# EAGLE board PFCEDU_V1 (EAGLE 8.7.1), part 1 of 2
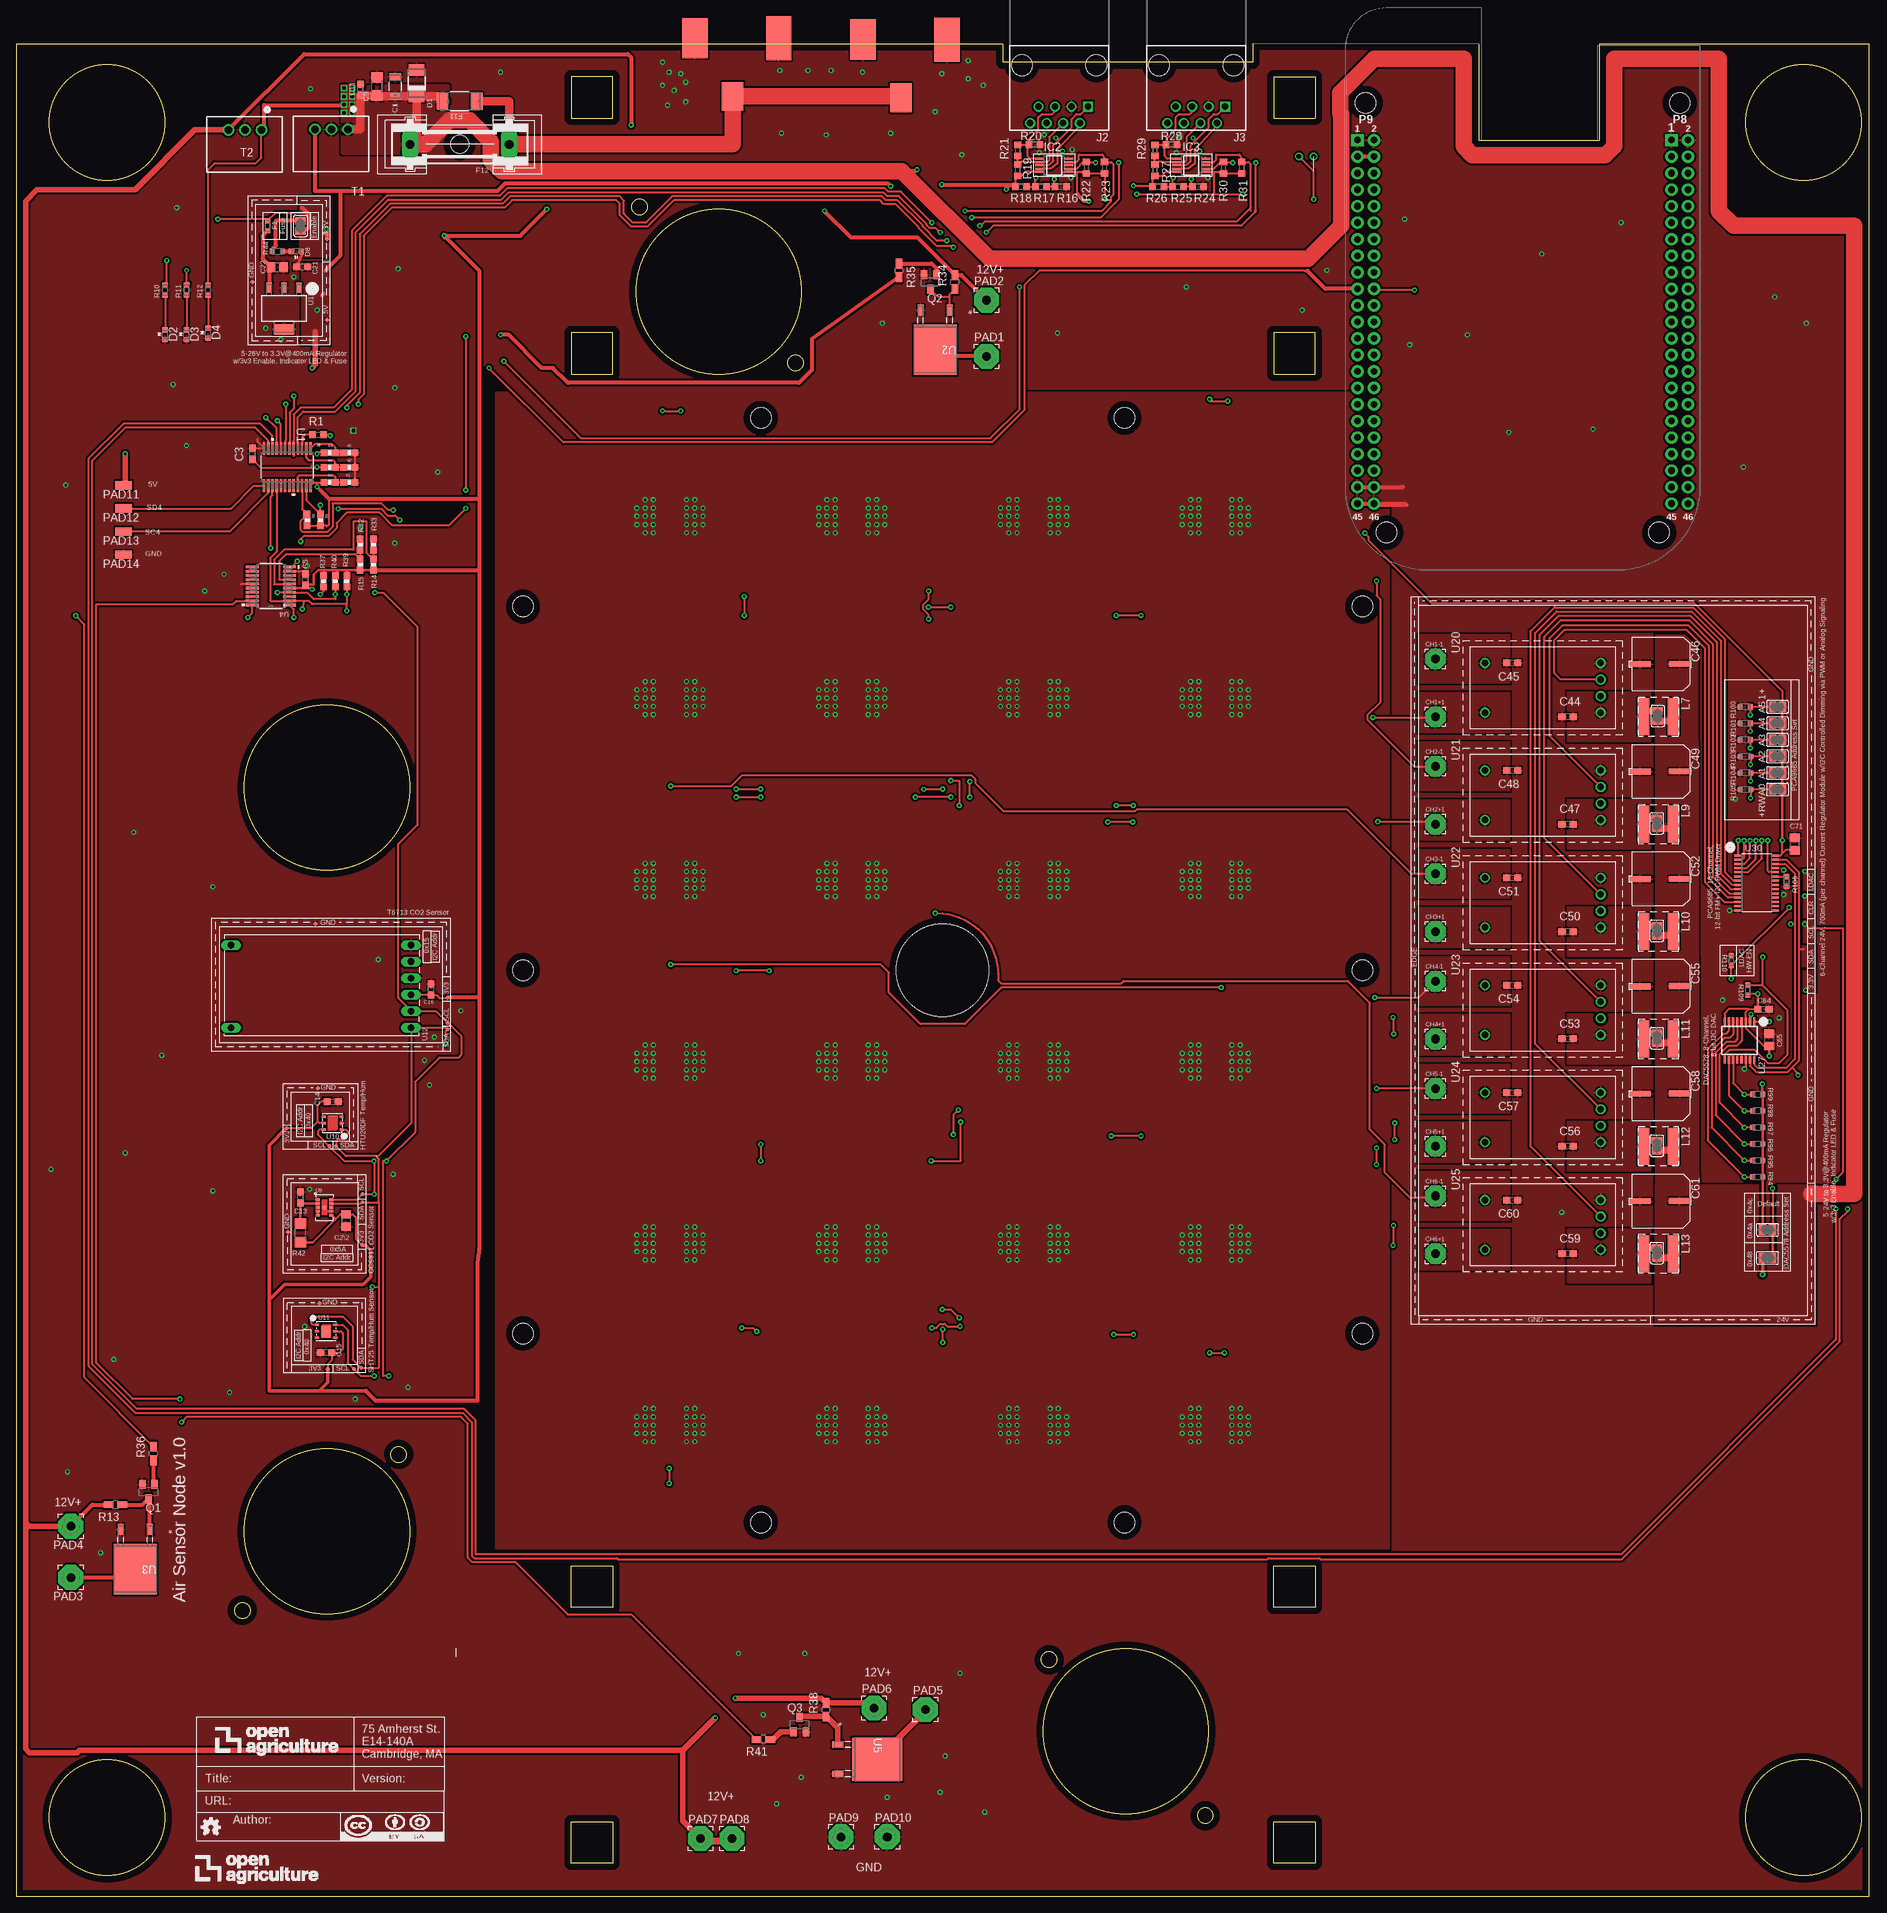
[diagram p0: board, top side]
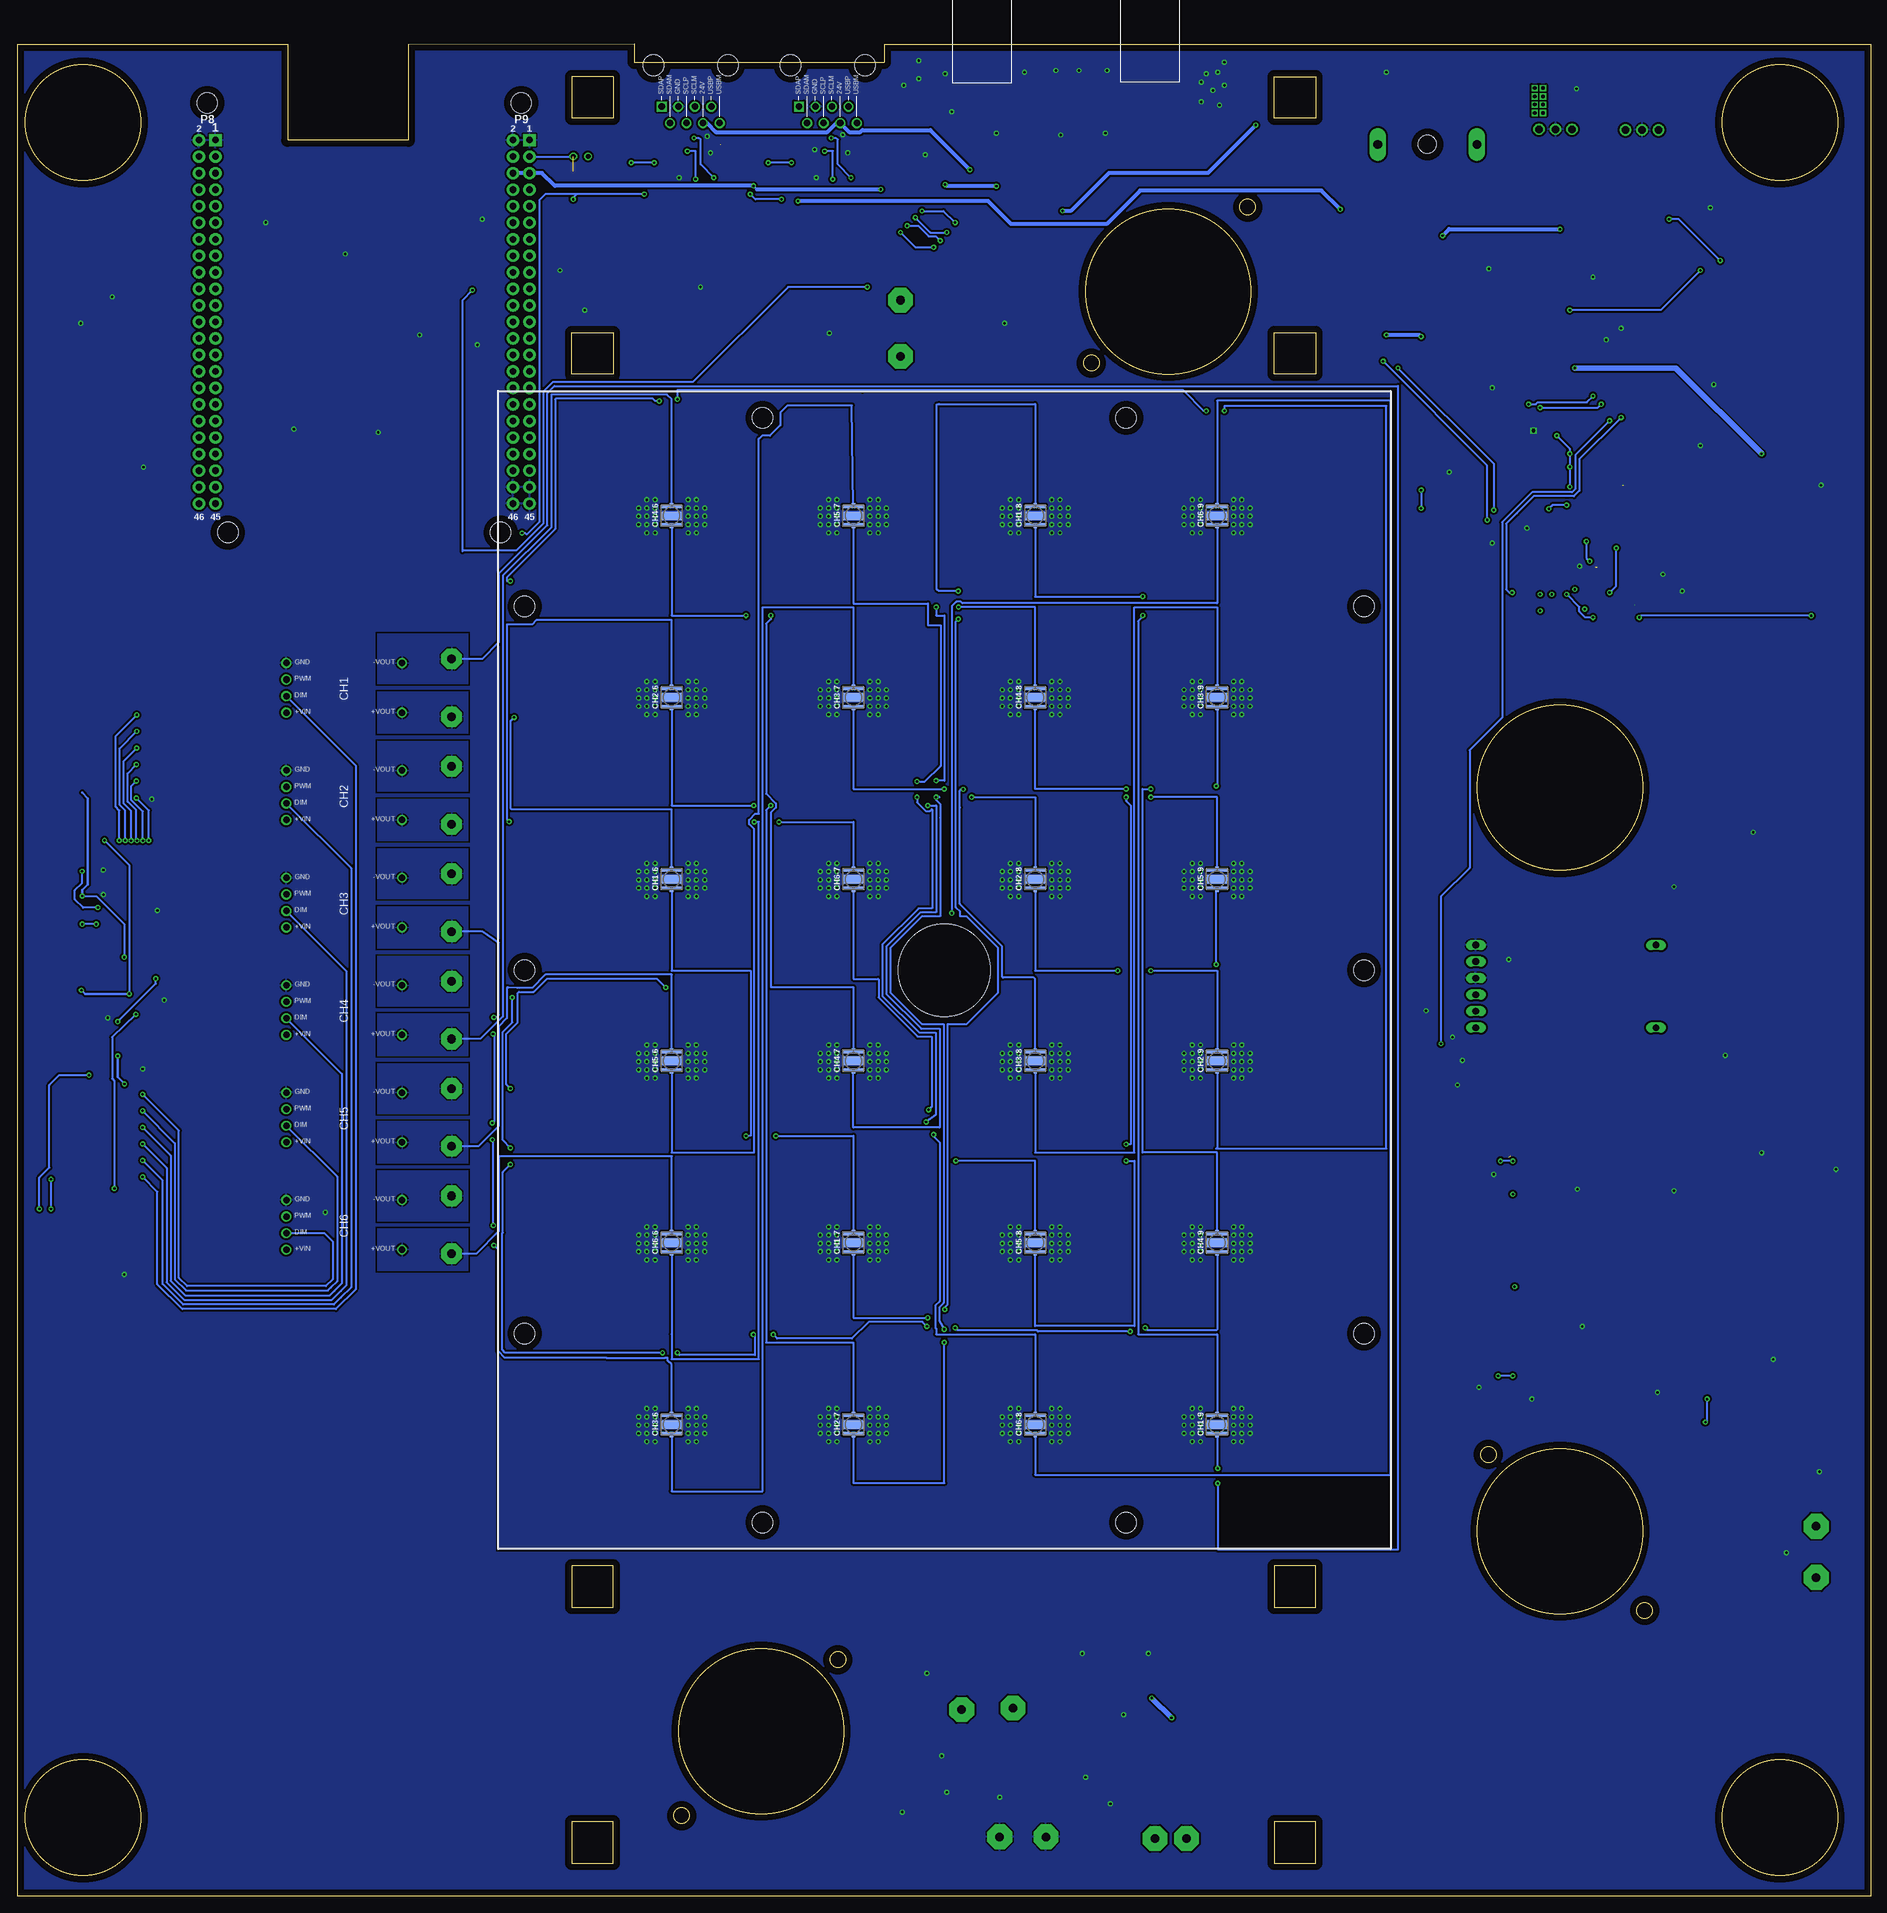
[diagram p1: board, bottom side, seen from below]

Size 284.73 x 284.79 mm. Coordinates in mm from the lower left corner, seen from the top.
Outline: 189.99,281.94 151.62,281.94 151.62,284.73 0,284.73 0,0 284.73,0 284.73,284.73 243.27,284.73 243.27,269.95 224.73,269.95 224.73,284.73 189.99,284.79 189.99,281.94
Outline: 91.66,279.71 85.31,279.71 85.31,273.36 91.66,273.36 91.66,279.71
Outline: 91.66,240.34 85.31,240.34 85.31,233.99 91.66,233.99 91.66,240.34
Outline: 199.61,240.34 193.26,240.34 193.26,233.99 199.61,233.99 199.61,240.34
Outline: 193.26,273.36 199.61,273.36 199.61,279.71 193.26,279.71 193.26,273.36
Outline: 199.61,11.43 199.61,5.08 193.26,5.08 193.26,11.43 199.61,11.43
Outline: 199.61,50.8 199.61,44.45 193.26,44.45 193.26,50.8 199.61,50.8
Outline: 91.66,11.43 91.66,5.08 85.31,5.08 85.31,11.43 91.66,11.43
Outline: 91.66,50.8 91.66,44.45 85.31,44.45 85.31,50.8 91.66,50.8
Outline: circle at 274.7,12.1 radius 8.89
Outline: circle at 13.97,12.1 radius 8.89
Outline: circle at 119.75,235.7 radius 1.2
Outline: circle at 95.76,259.68 radius 1.2
Outline: circle at 158.73,36.4 radius 1.2
Outline: circle at 182.72,12.41 radius 1.2
Outline: circle at 58.75,67.93 radius 1.2
Outline: circle at 34.76,43.94 radius 1.2
Outline: circle at 47.75,170.43 radius 12.7
Outline: circle at 47.75,56.13 radius 12.7
Outline: circle at 274.7,272.69 radius 8.89
Outline: circle at 170.53,25.4 radius 12.7
Outline: circle at 107.95,246.69 radius 12.7
Outline: circle at 13.97,272.69 radius 8.89
Copper layers (1*16): Top 0.035mm / dielectric 1.5mm / Bottom 0.035mm
Design rules "default *": minimum track width 6mil, minimum drill 0.35mm, track to track 4mil, track to pad 4mil, pad to pad 6mil, via to via 6mil, smd to smd 6mil, copper to edge 40mil, drill to drill 6mil, minimum pad ring 10mil, minimum via ring 8mil, stop-mask expansion 4mil, vias tented up to drill 25mil, thermal gap 10mil
Holes 3.17 mm at 114.43,57.48 170.31,57.48 206.86,86.51 206.86,142.39 206.86,198.27 170.31,227.28 114.43,227.28 77.88,198.27 77.88,142.39 77.88,86.51
Holes 14.22 mm at 142.37,142.37
Milling: 2 lines

## Footprints (pad centres in the part's own frame; a part is rotated, then mirrored left to right if it is on the bottom)
CAP_C1206 = smd 1.118 x 1.803: 1 -1.499,0; 2 1.499,0
C0805 = smd 1.3 x 1.5: 1 -0.95,0; 2 0.95,0
C0603@1 = smd 1.1 x 1: 1 -0.85,0; 2 0.85,0
C1206 = smd 1.6 x 1.8: 1 -1.4,0; 2 1.4,0
C0603 = smd 1.1 x 1: 1 -0.85,0; 2 0.85,0
EEE-1HA101UP = smd 0.889 x 3.404: + 0,-3.251 | smd 0.889 x 3.251: - -0.051,2.794
3,17/1,3 = drill 1.321 pad 3.175 octagon: 1 0,0
CREE-XLAMP-XP-E = smd 0.5 x 3.3: A 1.4,0; C -1.4,0 | smd 0.45 x 0.5: A@1 1.725,0; C@1 -1.725,0 | smd 1.3 x 3.3: THERM 0,0
DO-214AC = smd 1.8 x 2.4: A 2.025,0; C -2.025,0
CHIPLED_0603 = smd 0.8 x 0.8: A 0,-0.75; C 0,0.75
0603 = smd 0.756 x 0.8: 1 -0.778,0; 2 0.778,0
SS = smd 1.803 x 2.642: 1 -2.629,0; 2 2.629,0
GSH15 = drill 1.321 pad 2.54 long: 1 -7.62,0; 2 7.62,0 | hole 2.794: 0,0
SOP50P490X110-10N = smd 1.4 x 0.3: 1 -2.2,1; 2 -2.2,0.5; 3 -2.2,0; 4 -2.2,-0.5; 5 -2.2,-1; 6 2.2,-1; 7 2.2,-0.5; 8 2.2,0; 9 2.2,0.5; 10 2.2,1
OPENAG-V1-RJ45 = drill 1: 24V(6) 1.905,8.89; DSCLM(5) 0.635,6.35; DSCLP(4) -0.635,8.89; DSDAM(2) -3.175,8.89; GND(3) -1.905,6.35; USBM(8) 4.445,8.89; USBP(7) 3.175,6.35 | drill 1 square: DSDAP(1) -4.445,6.35 | hole 3.2: -5.715,0; 5.715,0
74404064121 = smd 1.8 x 5.7: 1 -2.3,0; 2 2.3,0
3,81/1,3 = drill 1.321 pad 3.81 octagon: 1 0,0
SMD1,27-2,54 = smd 1.27 x 2.54: 1 0,0
SOT23-BEC = smd 1 x 1.4: B -0.95,-1.1; C 0,1.1; E 0.95,-1.1
R0603 = smd 1 x 1.1: 1 -0.85,0; 2 0.85,0
0603-RES = smd 1.1 x 1: 1 -0.85,0; 2 0.85,0
RC0603N = smd 0.756 x 0.8: 1 -0.778,0; 2 0.778,0
R0805W = smd 1.5 x 1: 1 -1.052,0; 2 1.052,0
R1206 = smd 1.6 x 1.803: 1 -1.422,0; 2 1.422,0
SOLDERJUMPER_REFLOW_NOPASTE = smd 1.168 x 1.6: 1 -0.762,0; 2 0.762,0
R-78E5.0-1.0 = drill 1.15 pad 1.75: 1 3.21,2; 2 5.75,2; 3 8.29,2
TP06R = smd 0.6 x 0.6: TP 0,0
PW24-M = smd 1.981 x 0.406: 1 -2.87,3.575; 2 -2.87,2.925; 3 -2.87,2.275; 4 -2.87,1.625; 5 -2.87,0.975; 6 -2.87,0.325; 7 -2.87,-0.325; 8 -2.87,-0.975; 9 -2.87,-1.625; 10 -2.87,-2.275; 11 -2.87,-2.925; 12 -2.87,-3.575; 13 2.87,-3.575; 14 2.87,-2.925; 15 2.87,-2.275; 16 2.87,-1.625; 17 2.87,-0.975; 18 2.87,-0.325; 19 2.87,0.325; 20 2.87,0.975; 21 2.87,1.625; 22 2.87,2.275; 23 2.87,2.925; 24 2.87,3.575
DPAK = smd 0.94 x 1.702: 1 -2.25,-6.109; 2 2.25,-6.109 | smd 6.655 x 7.722: 3 0,0
PW20-M = smd 1.981 x 0.406: 1 -2.87,2.925; 2 -2.87,2.275; 3 -2.87,1.625; 4 -2.87,0.975; 5 -2.87,0.325; 6 -2.87,-0.325; 7 -2.87,-0.975; 8 -2.87,-1.625; 9 -2.87,-2.275; 10 -2.87,-2.925; 11 2.87,-2.925; 12 2.87,-2.275; 13 2.87,-1.625; 14 2.87,-0.975; 15 2.87,-0.325; 16 2.87,0.325; 17 2.87,0.975; 18 2.87,1.625; 19 2.87,2.275; 20 2.87,2.925
CCS811 = smd 0.6 x 0.4: 1 -1.05,1.2; 2 -1.05,0.6; 3 -1.05,0; 4 -1.05,-0.6; 5 -1.05,-1.2; 6 1.05,-1.2; 7 1.05,-0.6; 8 1.05,0; 9 1.05,0.6; 10 1.05,1.2; EP 0,0
HTU20D(F) = smd 0.4 x 0.6: 1 -1,-1.35; 2 0,-1.35; 3 1,-1.35; 4 1,1.35; 5 0,1.35; 6 -1,1.35
SHT2X = smd 0.3 x 0.4: 1 -1,-1.4; 2 0,-1.4; 3 1,-1.4; 4 1,1.4; 5 0,1.4; 6 -1,1.4 | smd 1.651 x 1.27: 7 0,0
T6713 = drill 1.016 long: 1 1.27,-1.27; 2 1.27,-3.81; 3 1.27,-6.35; 4 1.27,-8.89; 5 1.27,-11.43; 6 1.27,-13.97; 7 28.96,-13.97; 8 28.96,-1.27
MP04A = smd 1.6 x 0.838: 1 -3.2,2.3; 2 -3.2,0; 3 -3.2,-2.3 | smd 1.6 x 3.099: 4 3.2,0
RCD-24-PINNED = drill 1: 1 0,0; 2 0,-2.54; 3 0,-5.08; 4 0,-7.62; 5 17.78,-7.62; 6 17.78,0
TSSOP16 = smd 0.35 x 1.2: 1 -2.275,-2.925; 2 -1.625,-2.925; 3 -0.975,-2.925; 4 -0.325,-2.925; 5 0.325,-2.925; 6 0.975,-2.925; 7 1.625,-2.925; 8 2.275,-2.925; 9 2.275,2.925; 10 1.625,2.925; 11 0.975,2.925; 12 0.325,2.925; 13 -0.325,2.925; 14 -0.975,2.925; 15 -1.625,2.925; 16 -2.275,2.925
TSSOP28 = smd 0.305 x 0.991: 1 -4.225,-2.918; 2 -3.575,-2.918; 3 -2.925,-2.918; 4 -2.275,-2.918; 5 -1.625,-2.918; 6 -0.975,-2.918; 7 -0.325,-2.918; 8 0.325,-2.918; 9 0.975,-2.918; 10 1.625,-2.918; 11 2.275,-2.918; 12 2.925,-2.918; 13 3.575,-2.918; 14 4.225,-2.918; 15 4.225,2.918; 16 3.575,2.918; 17 2.925,2.918; 18 2.275,2.918; 19 1.625,2.918; 20 0.975,2.918; 21 0.325,2.918; 22 -0.325,2.918; 23 -0.975,2.918; 24 -1.625,2.918; 25 -2.275,2.918; 26 -2.925,2.918; 27 -3.575,2.918; 28 -4.225,2.918
PJ-036AH = smd 4.4 x 3.3: 1 2.2,-0.65 | smd 6.75 x 3.9: 2 -6.75,6.45 | smd 6.2 x 3.9: 3 -6.75,-6.45
BEAGLE_BONE_BLACK_CAPE = drill 1.016 pad 1.88 square: P8.1 20.32,50.165; P9.1 20.32,1.905 | drill 1.016 pad 1.88: P8.2 20.32,52.705; P8.3 22.86,50.165; P8.4 22.86,52.705; P8.5 25.4,50.165; P8.6 25.4,52.705; P8.7 27.94,50.165; P8.8 27.94,52.705; P8.9 30.48,50.165; P8.10 30.48,52.705; P8.11 33.02,50.165; P8.12 33.02,52.705; P8.13 35.56,50.165; P8.14 35.56,52.705; P8.15 38.1,50.165; P8.16 38.1,52.705; P8.17 40.64,50.165; P8.18 40.64,52.705; P8.19 43.18,50.165; P8.20 43.18,52.705; P8.21 45.72,50.165; P8.22 45.72,52.705; P8.23 48.26,50.165; P8.24 48.26,52.705; P8.25 50.8,50.165; P8.26 50.8,52.705; P8.27 53.34,50.165; P8.28 53.34,52.705; P8.29 55.88,50.165; P8.30 55.88,52.705; P8.31 58.42,50.165; P8.32 58.42,52.705; P8.33 60.96,50.165; P8.34 60.96,52.705; P8.35 63.5,50.165; P8.36 63.5,52.705; P8.37 66.04,50.165; P8.38 66.04,52.705; P8.39 68.58,50.165; P8.40 68.58,52.705; P8.41 71.12,50.165; P8.42 71.12,52.705; P8.43 73.66,50.165; P8.44 73.66,52.705; P8.45 76.2,50.165; P8.46 76.2,52.705; P9.2 20.32,4.445; P9.3 22.86,1.905; P9.4 22.86,4.445; P9.5 25.4,1.905; P9.6 25.4,4.445; P9.7 27.94,1.905; P9.8 27.94,4.445; P9.9 30.48,1.905; P9.10 30.48,4.445; P9.11 33.02,1.905; P9.12 33.02,4.445; P9.13 35.56,1.905; P9.14 35.56,4.445; P9.15 38.1,1.905; P9.16 38.1,4.445; P9.17 40.64,1.905; P9.18 40.64,4.445; P9.19 43.18,1.905; P9.20 43.18,4.445; P9.21 45.72,1.905; P9.22 45.72,4.445; P9.23 48.26,1.905; P9.24 48.26,4.445; P9.25 50.8,1.905; P9.26 50.8,4.445; P9.27 53.34,1.905; P9.28 53.34,4.445; P9.29 55.88,1.905; P9.30 55.88,4.445; P9.31 58.42,1.905; P9.32 58.42,4.445; P9.33 60.96,1.905; P9.34 60.96,4.445; P9.35 63.5,1.905; P9.36 63.5,4.445; P9.37 66.04,1.905; P9.38 66.04,4.445; P9.39 68.58,1.905; P9.40 68.58,4.445; P9.41 71.12,1.905; P9.42 71.12,4.445; P9.43 73.66,1.905; P9.44 73.66,4.445; P9.45 76.2,1.905; P9.46 76.2,4.445 | hole 3.175: 14.605,3.175; 80.645,6.35; 80.645,48.26; 14.605,51.435

## Placement (x,y rotation side)
ATTRIBUTES  [DOCFIELD]  27.7,8.53 0 top
C1  4.7uF  [CAP_C1206]  58.23,278.22 90 top
C2\2  4.7uF  [C0805]  50.66,103.88 270 top
C3  .1uF  [C0603@1]  36.31,221.75 90 top
C5  .1uF  [C0603@1]  44.45,202.44 90 top
C9  10uF  [C1206]  55.44,278.22 90 top
C11  .1uF  [C0603@1]  52.9,277.71 90 top
C13  0.1uF  [C0603]  43.68,107.43 90 top
C14  0.1uF  [C0603]  48.63,122.17 0 top
C15  0.1uF  [C0603]  47.61,83.56 180 top
C16  0.1uF  [C0603]  63.74,139.39 90 top
C21  0.1uF  [C0603]  43.94,250.44 180 top
C22  10uF  [C0805]  40.13,250.44 0 top
C44  10nF  [C0603]  238.4,181.33 180 top
C45  10nF  [C0603]  229.9,189.59 0 top
C46  100uF  [EEE-1HA101UP]  252.37,189.46 90 top
C47  10nF  [C0603]  238.4,164.82 180 top
C48  10nF  [C0603]  229.9,173.08 0 top
C49  100uF  [EEE-1HA101UP]  252.37,172.95 90 top
C50  10nF  [C0603]  238.4,148.31 180 top
C51  10nF  [C0603]  229.9,156.57 0 top
C52  100uF  [EEE-1HA101UP]  252.37,156.44 90 top
C53  10nF  [C0603]  238.4,131.8 180 top
C54  10nF  [C0603]  229.9,140.06 0 top
C55  100uF  [EEE-1HA101UP]  252.37,139.93 90 top
C56  10nF  [C0603]  238.4,115.29 180 top
C57  10nF  [C0603]  229.9,123.55 0 top
C58  100uF  [EEE-1HA101UP]  252.37,123.42 90 top
C59  10nF  [C0603]  238.4,98.78 180 top
C60  10nF  [C0603]  229.9,107.04 0 top
C61  100uF  [EEE-1HA101UP]  252.37,106.91 90 top
C64  0.1uF  [C0603]  268.5,136.37 0 top
C65  4.7uF  [C0805]  269.39,131.67 90 top
C71  10uF  [C0805]  273.33,161.77 90 top
CH1+1  [3,17/1,3]  218.08,181.33 0 top
CH1-1  [3,17/1,3]  218.08,190.22 0 top
CH1-6  XP-E  [CREE-XLAMP-XP-E]  184.28,156.36 90 bottom
CH1-7  XP-E  [CREE-XLAMP-XP-E]  156.34,100.48 90 bottom
CH1-8  XP-E  [CREE-XLAMP-XP-E]  128.4,212.24 90 bottom
CH1-9  XP-E  [CREE-XLAMP-XP-E]  100.46,72.54 90 bottom
CH2+1  [3,17/1,3]  218.08,164.82 0 top
CH2-1  [3,17/1,3]  218.08,173.71 0 top
CH2-6  XP-E  [CREE-XLAMP-XP-E]  184.28,184.3 90 bottom
CH2-7  XP-E  [CREE-XLAMP-XP-E]  156.34,72.54 90 bottom
CH2-8  XP-E  [CREE-XLAMP-XP-E]  128.4,156.36 90 bottom
CH2-9  XP-E  [CREE-XLAMP-XP-E]  100.46,128.42 90 bottom
CH3+1  [3,17/1,3]  218.08,148.31 0 top
CH3-1  [3,17/1,3]  218.08,157.2 0 top
CH3-6  XP-E  [CREE-XLAMP-XP-E]  184.28,72.54 90 bottom
CH3-7  XP-E  [CREE-XLAMP-XP-E]  156.34,184.3 90 bottom
CH3-8  XP-E  [CREE-XLAMP-XP-E]  128.4,128.42 90 bottom
CH3-9  XP-E  [CREE-XLAMP-XP-E]  100.46,184.3 90 bottom
CH4+1  [3,17/1,3]  218.08,131.8 0 top
CH4-1  [3,17/1,3]  218.08,140.69 0 top
CH4-6  XP-E  [CREE-XLAMP-XP-E]  184.28,212.24 90 bottom
CH4-7  XP-E  [CREE-XLAMP-XP-E]  156.34,128.42 90 bottom
CH4-8  XP-E  [CREE-XLAMP-XP-E]  128.4,184.3 90 bottom
CH4-9  XP-E  [CREE-XLAMP-XP-E]  100.46,100.48 90 bottom
CH5+1  [3,17/1,3]  218.08,115.29 0 top
CH5-1  [3,17/1,3]  218.08,124.18 0 top
CH5-6  XP-E  [CREE-XLAMP-XP-E]  184.28,128.42 90 bottom
CH5-7  XP-E  [CREE-XLAMP-XP-E]  156.34,212.24 90 bottom
CH5-8  XP-E  [CREE-XLAMP-XP-E]  128.4,100.48 90 bottom
CH5-9  XP-E  [CREE-XLAMP-XP-E]  100.46,156.36 90 bottom
CH6+1  [3,17/1,3]  218.08,98.78 0 top
CH6-1  [3,17/1,3]  218.08,107.67 0 top
CH6-6  XP-E  [CREE-XLAMP-XP-E]  184.28,100.48 90 bottom
CH6-7  XP-E  [CREE-XLAMP-XP-E]  156.34,156.36 90 bottom
CH6-8  XP-E  [CREE-XLAMP-XP-E]  128.4,72.54 90 bottom
CH6-9  XP-E  [CREE-XLAMP-XP-E]  100.46,212.24 90 bottom
D1  SMAJ14A  [DO-214AC]  61.54,278.72 90 top
D2  APT1608CGCK  [CHIPLED_0603]  22.87,240.04 180 top
D3  APT1608CGCK  [CHIPLED_0603]  26.17,240.04 180 top
D4  APT1608CGCK  [CHIPLED_0603]  29.47,240.29 180 top
D8  APT1608CGCK  [CHIPLED_0603]  43.05,252.86 270 top
F1  0448.400MR  [0603]  38.61,256.79 90 top
F11  SST 7  [SS]  68.14,275.93 180 top
F12  [GSH15]  68.14,269.33 180 top
IC2  PCA9615DP  [SOP50P490X110-10N]  159.5,266.11 180 top
IC3  PCA9615DP  [SOP50P490X110-10N]  180.58,266.11 180 top
J2  54602-908LF  [OPENAG-V1-RJ45]  160.26,281.48 180 top
J3  54602-908LF  [OPENAG-V1-RJ45]  181.35,281.48 180 top
L7  120uH  [74404064121]  252.37,181.33 180 top
L9  120uH  [74404064121]  252.37,164.82 180 top
L10  120uH  [74404064121]  252.37,148.31 180 top
L11  120uH  [74404064121]  252.37,131.8 180 top
L12  120uH  [74404064121]  252.37,115.29 180 top
L13  120uH  [74404064121]  252.37,98.78 180 top
PAD1  WIREPAD3,81/1,3  [3,81/1,3]  149.1,236.73 0 top
PAD2  WIREPAD3,81/1,3  [3,81/1,3]  149.1,245.36 0 top
PAD3  WIREPAD3,81/1,3  [3,81/1,3]  8.38,49.02 180 top
PAD4  WIREPAD3,81/1,3  [3,81/1,3]  8.38,56.9 180 top
PAD5  WIREPAD3,81/1,3  [3,81/1,3]  139.7,28.7 0 top
PAD6  WIREPAD3,81/1,3  [3,81/1,3]  131.83,28.96 0 top
PAD7  WIREPAD3,81/1,3  [3,81/1,3]  105.16,8.89 0 top
PAD8  WIREPAD3,81/1,3  [3,81/1,3]  109.98,8.89 0 top
PAD9  WIREPAD3,81/1,3  [3,81/1,3]  126.75,9.14 0 top
PAD10  WIREPAD3,81/1,3  [3,81/1,3]  133.86,9.14 0 top
PAD11  [SMD1,27-2,54]  16.51,216.92 90 top
PAD12  [SMD1,27-2,54]  16.51,213.36 90 top
PAD13  [SMD1,27-2,54]  16.51,209.8 90 top
PAD14  [SMD1,27-2,54]  16.51,206.25 90 top
Q1  MMBT2222A  [SOT23-BEC]  20.32,62.23 180 top
Q2  MMBT2222A  [SOT23-BEC]  140.46,248.16 180 top
Q3  MMBT2222A  [SOT23-BEC]  120.4,26.42 0 top
R1  10K  [R0603]  46.35,224.67 0 top
R2  10K  [0603-RES]  48.18,217.36 180 top
R3  10K  [0603-RES]  51.17,217.36 180 top
R4  10K  [0603-RES]  48.2,221.9 180 top
R5  10K  [0603-RES]  51.17,221.9 180 top
R6  10K  [0603-RES]  48.18,219.64 180 top
R7  10K  [0603-RES]  51.17,219.64 180 top
R8  10K  [0603-RES]  44.71,211.59 270 top
R9  10K  [0603-RES]  46.73,211.59 270 top
R10  100  [RC0603N]  22.87,246.9 90 top
R11  100  [RC0603N]  26.17,246.9 90 top
R12  100  [RC0603N]  29.47,246.9 90 top
R13  [R0805W]  15.24,60.2 180 top
R14  10K  [0603-RES]  54.86,204.72 270 top
R15  10K  [0603-RES]  52.83,204.72 270 top
R16  600  [R0603]  160.52,262.81 0 top
R17  120  [R0603]  157.47,262.81 0 top
R18  600  [R0603]  154.42,262.81 0 top
R19  600  [R0603]  153.91,265.35 270 top
R20  600  [R0603]  156.45,269.28 180 top
R21  120  [R0603]  153.91,268.39 270 top
R22  10K  [R0603]  164.45,265.73 270 top
R23  10K  [R0603]  167.25,265.73 270 top
R24  600  [R0603]  181.6,262.81 0 top
R25  120  [R0603]  178.55,262.81 0 top
R26  600  [R0603]  175.5,262.81 0 top
R27  600  [R0603]  175,265.35 270 top
R28  600  [R0603]  177.54,269.28 180 top
R29  120  [R0603]  175,268.39 270 top
R30  10K  [R0603]  185.54,265.73 270 top
R31  10K  [R0603]  188.33,265.73 270 top
R32  10K  [0603-RES]  52.83,207.77 270 top
R33  10K  [0603-RES]  54.86,207.77 270 top
R34  [R0805W]  144.27,248.16 90 top
R35  [R0805W]  135.64,249.94 270 top
R36  [R0805W]  21.08,68.07 90 top
R37  10K  [0603-RES]  47.24,202.18 90 top
R38  [R0805W]  124.46,28.7 90 top
R39  10K  [0603-RES]  50.8,202.18 90 top
R40  10K  [0603-RES]  49.02,202.18 90 top
R41  [R0805W]  114.81,24.13 180 top
R42  4.7K  [R1206]  43.68,101.97 270 top
R44  100  [RC0603N]  40.13,252.86 180 top
R94  1K  [RC0603N]  267.61,110.59 180 top
R95  1K  [RC0603N]  267.61,113.13 180 top
R96  1K  [RC0603N]  267.61,115.67 180 top
R97  1K  [RC0603N]  267.61,118.21 180 top
R98  1K  [RC0603N]  267.61,120.75 180 top
R99  1K  [RC0603N]  267.61,123.29 180 top
R100  10K  [RC0603N]  265.72,182.85 0 top
R101  10K  [RC0603N]  265.72,180.31 0 top
R102  10K  [RC0603N]  265.72,177.77 0 top
R103  10K  [RC0603N]  265.75,175.23 0 top
R104  10K  [RC0603N]  265.75,172.69 0 top
R105  10K  [RC0603N]  265.75,170.15 0 top
R106  10K  [RC0603N]  272.03,155.99 270 top
R109  1K  [RC0603N]  266.09,139.29 90 top
R110  0 OHM  [RC0603N]  263.55,143.87 270 top
SJ1  [SOLDERJUMPER_REFLOW_NOPASTE]  43.69,256.79 270 top
SJ_A18  [SOLDERJUMPER_REFLOW_NOPASTE]  270.66,170.15 180 top
SJ_A19  [SOLDERJUMPER_REFLOW_NOPASTE]  270.66,172.69 180 top
SJ_A20  [SOLDERJUMPER_REFLOW_NOPASTE]  270.66,175.23 180 top
SJ_A21  [SOLDERJUMPER_REFLOW_NOPASTE]  270.66,177.77 180 top
SJ_A22  [SOLDERJUMPER_REFLOW_NOPASTE]  270.66,180.31 180 top
SJ_A23  [SOLDERJUMPER_REFLOW_NOPASTE]  270.66,182.85 180 top
SJ_A24  [SOLDERJUMPER_REFLOW_NOPASTE]  252.25,181.46 270 top
SJ_A25  [SOLDERJUMPER_REFLOW_NOPASTE]  252.12,164.95 270 top
SJ_A26  [SOLDERJUMPER_REFLOW_NOPASTE]  252.12,148.44 270 top
SJ_A27  [SOLDERJUMPER_REFLOW_NOPASTE]  252.12,131.93 270 top
SJ_A28  [SOLDERJUMPER_REFLOW_NOPASTE]  252.12,115.42 270 top
SJ_A29  [SOLDERJUMPER_REFLOW_NOPASTE]  252.12,98.91 270 top
SJ_A34  [SOLDERJUMPER_REFLOW_NOPASTE]  269.14,102.46 0 top
SJ_A35  [SOLDERJUMPER_REFLOW_NOPASTE]  269.14,98.15 0 top
T1  R-78E5.0-1.0  [R-78E5.0-1.0]  54.17,273.64 180 top
T2  R-78E12.0-1.0  [R-78E5.0-1.0]  40.89,273.56 180 top
TP1  TPTP06R  [TP06R]  53.2,107.94 180 top
TP2  TPTP06R  [TP06R]  53.2,106.67 180 top
TP3  TPTP06R  [TP06R]  41.77,102.1 180 top
TP5  TPTP06R  [TP06R]  53.2,100.07 180 top
TP6  TPTP06R  [TP06R]  49.14,115.31 90 top
TP7  TPTP06R  [TP06R]  48.12,115.31 90 top
TP36  TPTP06R  [TP06R]  41.52,118.1 90 top
TP37  TPTP06R  [TP06R]  46.34,124.2 90 top
TP38  TPTP06R  [TP06R]  52.95,81.27 90 top
TP39  TPTP06R  [TP06R]  51.93,81.02 90 top
TP40  TPTP06R  [TP06R]  46.6,91.18 90 top
TP41  TPTP06R  [TP06R]  47.87,81.02 90 top
TP42  TPTP06R  [TP06R]  66.28,133.29 180 top
TP43  TPTP06R  [TP06R]  66.28,134.31 180 top
TP44  TPTP06R  [TP06R]  66.28,138.12 180 top
TP45  TPTP06R  [TP06R]  45.96,149.55 180 top
TP61  TPTP06R  [TP06R]  36.32,248.16 270 top
TP62  TPTP06R  [TP06R]  47.75,242.32 270 top
TP63  TPTP06R  [TP06R]  47.75,254.76 270 top
U1  TCA9548APWRPW24-M  [PW24-M]  41.65,219.72 270 top
U2  STD12NF06LT4  [DPAK]  141.22,237.74 180 top
U3  STD12NF06LT4  [DPAK]  18.29,50.29 180 top
U4  PCF8574APWRPW20-M  [PW20-M]  39.12,201.42 180 top
U5  STD12NF06LT4  [DPAK]  132.33,21.08 270 top
U9  CCS811  [CCS811]  47.36,105.91 0 top
U10  HPP845E034R5  [HTU20D(F)]  48.63,118.86 90 top
U11  SHT25  [SHT2X]  47.61,86.86 270 top
U12  T6713-5K  [T6713]  61.96,132.27 180 top
U17  LM2937IMP3.3NOPB  [MP04A]  41.15,244.09 270 top
U20  RCD-24-0.70/VREF  [RCD-24-PINNED]  243.48,181.97 180 top
U21  RCD-24-0.70/VREF  [RCD-24-PINNED]  243.48,165.46 180 top
U22  RCD-24-0.70/VREF  [RCD-24-PINNED]  243.48,148.95 180 top
U23  RCD-24-0.70/VREF  [RCD-24-PINNED]  243.48,132.44 180 top
U24  RCD-24-0.70/VREF  [RCD-24-PINNED]  243.48,115.93 180 top
U25  RCD-24-0.70/VREF  [RCD-24-PINNED]  243.48,99.42 180 top
U27  DAC5578SPW  [TSSOP16]  264.82,131.55 180 top
U30  PCA9685  [TSSOP28]  267.46,155.8 270 top
U$1  PJ-036AH  [PJ-036AH]  110.73,278.88 270 top
U$2  BEAGLE_BONE_BLACK_CAPE  [BEAGLE_BONE_BLACK_CAPE]  204.21,290.29 270 top
U$3  PJ-036AH  [PJ-036AH]  136.59,278.68 270 top
U$9  [OPENAG-LOGO-750-MIL]  27.55,2.32 0 top

## Library data of the parts
ATTRIBUTES = openag-frames; AUTHOR: DP; DESCRIPTION: PFC EDU; TITLE: PFC EDU; URL: https://github.com/OpenAgInitiative/; VER: 1.0
C1 C2\2 C9 C13-C16 C21 C22 C44-C61 C64 C65 C71 = openag-capacitors; POPULATE: YES; VERIFIED: NO
C3 C5 C11 R1 R13 R16-R31 R34-R36 R38 R41 = rcl
CH1+1 CH1-1 CH2+1 CH2-1 CH3+1 CH3-1 CH4+1 CH4-1 CH5+1 CH5-1 CH6+1 CH6-1 = openag-wirepads
CH1-6-CH1-9 CH2-6-CH2-9 CH3-6-CH3-9 CH4-6-CH4-9 CH5-6-CH5-9 CH6-6-CH6-9 = Tomaszewski
D1-D4 D8 = openag-diodes; POPULATE: YES; VERIFIED: NO
F1 = openag-fuses; POPULATE: YES; VERIFIED: YES
F11 = openag-fuses; POPULATE: YES; VERIFIED: NO
F12 = fuse; MPN: 64900001039; OC_FARNELL: 1271673; OC_NEWARK: 02P0318
IC2 IC3 = PCA9615DP; DESCRIPTION: Buffer, ReDriver 2 Channel 400kHz 10-TSSOP; HEIGHT: 1.1mm; MANUFACTURER_NAME: Nexperia; MANUFACTURER_PART_NUMBER: PCA9615DP; SUPPLIER_NAME: RS
J2 J3 = openag_connector; POPULATE: YES; VERIFIED: NO
L7 L9-L13 = openag-inductors; POPULATE: YES; VERIFIED: NO
PAD1-PAD14 = wirepad
Q1-Q3 = transistor-npn
R2-R9 R14 R15 R32 R33 R37 R39 R40 = SparkFun-Resistors; PROD_ID: RES-00824
R10-R12 R42 R44 R94-R106 R109 R110 = openag-resistors; POPULATE: YES; VERIFIED: NO
SJ1 SJ_A18-SJ_A29 SJ_A34 SJ_A35 = openag-connectors; POPULATE: YES; VERIFIED: NO
T1 T2 = R-78E5.0-1.0; DESCRIPTION: Non-Isolated DC/DC Converters 8-28Vin 5V 1.0A THRU; HEIGHT: mm; MANUFACTURER_NAME: RECOM Power; MANUFACTURER_PART_NUMBER: R-78E5.0-1.0; RS_PART_NUMBER: 1446290; SUPPLIER_NAME: RS
TP1-TP3 TP5-TP7 TP36-TP45 TP61-TP63 = openag-testpads
U1 = OpenAG_I2C; MANUFACTURER_PART_NUMBER: TCA9548APWR; VENDOR: TEXAS INSTRUMENTS
U2 U3 U5 = OpenAG_I2C; MANUFACTURER_PART_NUMBER: STD12NF06LT4; VENDOR: ST Microelectronics
U4 = IO_Expander; MANUFACTURER_PART_NUMBER: PCF8574APWR; VENDOR: Texas Instruments
U9-U12 = openag-sensors; POPULATE: YES; VERIFIED: NO
U17 U20-U25 = openag-regulators; POPULATE: YES; VERIFIED: NO
U27 = openag-dacs; POPULATE: YES; VERIFIED: NO
U30 = openag-pwm
U$1 U$3 = PJ-036ah
U$2 = SparkFun-Boards
U$9 = openag-frames

## Nets
24V_IN: F11.1 F12.1 U$1.1 U$3.1
!LDAC!: R110.2 U27.1
+3V3: C2\2.1 C3.1 C5.1 C14.1 C15.1 C16.1 C64.1 C65.1 C71.1 F1.2 IC2.1 IC3.1 R1.2 R2.2 R4.2 R6.2 R8.2 R9.2 R10.2 R14.2 R15.2 R22.2 R23.2 R30.2 R31.2 R37.2 R39.2 R40.2 R42.2 R94.1 R95.1 R96.1 R97.1 R98.1 R99.1 R109.1 SJ1.2 SJ_A18.1 SJ_A19.1 SJ_A20.1 SJ_A21.1 SJ_A22.1 SJ_A23.1 SJ_A34.1 TP5.TP TP36.TP TP41.TP TP44.TP TP63.TP U1.24 U4.5 U9.6 U10.5 U11.5 U12.3 U27.3 U27.8 U30.28 U$2.P9.3 U$2.P9.4
+5V: C21.1 IC2.10 IC3.10 PAD11.1 R11.2 R18.1 R19.2 R26.1 R27.2 T1.3 TP62.TP U17.1 U$2.P9.5 U$2.P9.6
+12V: PAD2.1 PAD4.1 PAD6.1 PAD7.1 PAD8.1 R13.2 R34.2 R38.2 T2.3
+24V: C1.1 C9.1 C11.1 C46.+ C49.+ C52.+ C55.+ C58.+ C61.+ D1.C F11.2 F12.2 J2.24V(6) J3.24V(6) L7.1 L9.1 L10.1 L11.1 L12.1 L13.1 R12.2 SJ_A24.2 SJ_A25.2 SJ_A26.2 SJ_A27.2 SJ_A28.2 SJ_A29.2 T1.1 T2.1
A0: R105.2 SJ_A18.2 U30.1
A0_EXT_1: R4.1 R5.2 U1.1
A0_IO: R14.1 R33.2 U4.6
A1: R104.2 SJ_A19.2 U30.2
A1_EXT_1: R6.1 R7.2 U1.2
A1_IO: R15.1 R32.2 U4.7
A2: R103.2 SJ_A20.2 U30.3
A2_EXT_1: R2.1 R3.2 U1.21
A3: R102.2 SJ_A21.2 U30.4
A4: R101.2 SJ_A22.2 U30.5
A5: R100.2 SJ_A23.2 U30.24
ADDR0: SJ_A34.2 SJ_A35.2 U27.2
CH1+: CH1+1.1 CH1-6.A CH1-6.A@1 U20.6
CH1-: C45.1 CH1-1.1 CH1-9.C CH1-9.C@1 U20.5
CH2+: CH2+1.1 CH2-6.A CH2-6.A@1 U21.6
CH2-: C48.1 CH2-1.1 CH2-9.C CH2-9.C@1 U21.5
CH3+: CH3+1.1 CH3-6.A CH3-6.A@1 U22.6
CH3-: C51.1 CH3-1.1 CH3-9.C CH3-9.C@1 U22.5
CH4+: CH4+1.1 CH4-6.A CH4-6.A@1 U23.6
CH4-: C54.1 CH4-1.1 CH4-9.C CH4-9.C@1 U23.5
CH5+: CH5+1.1 CH5-6.A CH5-6.A@1 U24.6
CH5-: C57.1 CH5-1.1 CH5-9.C CH5-9.C@1 U24.5
CH6+: CH6+1.1 CH6-6.A CH6-6.A@1 U25.6
CH6-: C60.1 CH6-1.1 CH6-9.C CH6-9.C@1 U25.5
DAC_!CLR!: R109.2 U27.9
DIM1: R94.2 U20.2 U27.7
DIM2: R95.2 U21.2 U27.6
DIM3: R96.2 U22.2 U27.5
DIM4: R97.2 U23.2 U27.4
DIM5: R98.2 U24.2 U27.10
DIM6: R99.2 U25.2 U27.11
DSCLM0: IC2.6 J2.DSCLM(5) R20.2 R21.1
DSCLM1: IC3.6 J3.DSCLM(5) R28.2 R29.1
DSCLP0: IC2.7 J2.DSCLP(4) R19.1 R21.2
DSCLP1: IC3.7 J3.DSCLP(4) R27.1 R29.2
DSDAM0: IC2.9 J2.DSDAM(2) R16.1 R17.2
DSDAM1: IC3.9 J3.DSDAM(2) R24.1 R25.2
DSDAP0: IC2.8 J2.DSDAP(1) R17.1 R18.2
DSDAP1: IC3.8 J3.DSDAP(1) R25.1 R26.2
GND: C1.2 C2\2.2 C3.2 C5.2 C9.2 C11.2 C13.2 C14.2 C15.2 C16.2 C21.2 C22.2 C44.2 C45.2 C46.- C47.2 C48.2 C49.- C50.2 C51.2 C52.- C53.2 C54.2 C55.- C56.2 C57.2 C58.- C59.2 C60.2 C61.- C64.2 C65.2 C71.2 D1.A D2.C D3.C D4.C D8.C IC2.5 IC3.5 J2.GND(3) J3.GND(3) PAD9.1 PAD10.1 PAD14.1 Q1.E Q2.E Q3.E R3.1 R5.1 R7.1 R16.2 R20.1 R24.2 R28.1 R32.1 R33.1 R100.1 R101.1 R102.1 R103.1 R104.1 R105.1 R106.2 R110.1 SJ_A35.1 T1.2 T2.2 TP3.TP TP37.TP TP40.TP TP45.TP TP61.TP U1.12 U2.2 U3.2 U4.9 U4.15 U5.2 U9.1 U9.7 U9.EP U10.2 U11.2 U12.4 U12.6 U17.2 U17.4 U20.4 U21.4 U22.4 U23.4 U24.4 U25.4 U27.14 U30.14 U30.25 U$1.2 U$1.3 U$2.P8.1 U$2.P8.2 U$2.P9.1 U$2.P9.2 U$2.P9.43 U$2.P9.44 U$2.P9.45 U$2.P9.46 U$3.2 U$3.3
MOS1: PAD3.1 U3.3
MOS2: PAD1.1 U2.3
MOS3: PAD5.1 U5.3
N$1: U$2.P8.45
N$2: D3.A R11.1
N$3: U$2.P8.43
N$4: D4.A R12.1
N$5: Q1.C R13.1 U3.1
N$6: U$2.P8.41
N$7: U$2.P8.39
N$8: U$2.P8.37
N$9: Q1.B R36.1
N$10: U$2.P8.35
N$11: U$2.P8.33
N$12: D2.A R10.1
N$13: R37.1 U4.1
N$14: Q2.C R34.1 U2.1
N$15: Q2.B R35.1
N$16: Q3.C R38.1 U5.1
N$17: Q3.B R41.1
N$29: CH2-8.C CH2-8.C@1 CH2-9.A CH2-9.A@1
N$30: U$2.P8.31
N$31: CH2-7.C CH2-7.C@1 CH2-8.A CH2-8.A@1
N$32: CH2-6.C CH2-6.C@1 CH2-7.A CH2-7.A@1
N$33: CH4-8.C CH4-8.C@1 CH4-9.A CH4-9.A@1
N$34: CH4-7.C CH4-7.C@1 CH4-8.A CH4-8.A@1
N$35: CH4-6.C CH4-6.C@1 CH4-7.A CH4-7.A@1
N$36: CH6-8.C CH6-8.C@1 CH6-9.A CH6-9.A@1
N$37: CH6-7.C CH6-7.C@1 CH6-8.A CH6-8.A@1
N$38: C44.1 L7.2 SJ_A24.1 U20.1
N$39: C47.1 L9.2 SJ_A25.1 U21.1
N$40: C50.1 L10.2 SJ_A26.1 U22.1
N$41: C53.1 L11.2 SJ_A27.1 U23.1
N$42: U9.4 U9.5
N$43: C13.1 R42.1 U9.2
N$44: C56.1 L12.2 SJ_A28.1 U24.1
N$45: C59.1 L13.2 SJ_A29.1 U25.1
N$46: CH6-6.C CH6-6.C@1 CH6-7.A CH6-7.A@1
N$47: CH1-8.C CH1-8.C@1 CH1-9.A CH1-9.A@1
N$48: CH1-7.C CH1-7.C@1 CH1-8.A CH1-8.A@1
N$53: U$2.P8.29
N$54: U$2.P8.27
N$55: U$2.P8.25
N$67: U$2.P8.23
N$74: U$2.P8.21
N$75: U$2.P8.19
N$76: U$2.P8.17
N$77: U$2.P8.15
N$78: U$2.P8.13
N$81: CH1-6.C CH1-6.C@1 CH1-7.A CH1-7.A@1
N$82: CH3-8.C CH3-8.C@1 CH3-9.A CH3-9.A@1
N$83: CH3-7.C CH3-7.C@1 CH3-8.A CH3-8.A@1
N$84: CH3-6.C CH3-6.C@1 CH3-7.A CH3-7.A@1
N$85: CH5-8.C CH5-8.C@1 CH5-9.A CH5-9.A@1
N$90: U$2.P8.11
N$97: U$2.P8.9
N$98: U$2.P8.7
N$99: U$2.P8.5
N$100: U$2.P8.3
N$101: U$2.P8.46
N$102: U$2.P8.44
N$103: U$2.P8.42
N$104: U$2.P8.40
N$105: U$2.P8.38
N$106: U$2.P8.36
N$107: U$2.P8.34
N$108: U$2.P8.32
N$109: U$2.P8.30
N$110: U$2.P8.28
N$111: U$2.P8.26
N$112: U$2.P8.24
N$113: U$2.P8.22
N$114: U$2.P8.20
N$115: U$2.P8.18
N$116: U$2.P8.16
N$117: U$2.P8.14
N$118: U$2.P8.12
N$119: U$2.P8.10
N$120: U$2.P8.8
N$121: U$2.P8.6
N$122: U$2.P8.4
N$123: U$2.P9.42
N$124: U$2.P9.40
N$125: U$2.P9.38
N$126: U$2.P9.36
N$127: U$2.P9.34
N$128: U$2.P9.32
N$129: U$2.P9.30
N$130: U$2.P9.28
N$131: U$2.P9.26
N$132: U$2.P9.24
N$133: U$2.P9.22
N$134: U$2.P9.18
N$135: U$2.P9.16
N$136: U$2.P9.14
N$137: U$2.P9.12
N$138: U$2.P9.10
N$139: U$2.P9.8
N$140: U$2.P9.41
N$141: U$2.P9.39
N$142: U$2.P9.37
N$143: U$2.P9.35
N$144: U$2.P9.33
N$145: U$2.P9.31
N$146: U$2.P9.29
N$147: U$2.P9.27
N$148: U$2.P9.25
N$149: U$2.P9.23
N$150: U$2.P9.21
N$151: U$2.P9.17
N$152: U$2.P9.15
N$153: U$2.P9.13
N$154: U$2.P9.11
N$155: U$2.P9.9
N$156: U$2.P9.7
N$159: CH5-7.C CH5-7.C@1 CH5-8.A CH5-8.A@1
N$160: CH5-6.C CH5-6.C@1 CH5-7.A CH5-7.A@1
N$179: D8.A R44.1
N$180: C22.1 F1.1 U17.3
OE: R106.1 U30.23
P0_IO: R35.2 U4.10
P1_IO: U4.11
P2_IO: U4.12
P3_IO: U4.14
P4_IO: U4.16
P5_IO: U4.17
P6_IO: R41.2 U4.19
P7_IO: R36.2 U4.20
PWM1: U20.3 U30.12
PWM2: U21.3 U30.11
PWM3: U22.3 U30.10
PWM4: U23.3 U30.9
PWM5: U24.3 U30.8
PWM6: U25.3 U30.7
REG_3V3_400MA: R44.2 SJ1.1
RESET1: R1.1 U1.3
SC0: IC2.4 R23.1 U1.5
SC1: IC3.4 R31.1 U1.7
SC2: TP1.TP TP7.TP TP39.TP TP43.TP U1.9 U9.10 U10.6 U11.6 U12.2
SC3: U1.11 U27.16 U30.26
SC4: PAD13.1 U1.14
SC5: R39.1 U1.16 U4.2
SC6: U1.18
SC7: U1.20
SCL: R8.1 U1.22 U$2.P9.19
SD0: IC2.2 R22.1 U1.4
SD1: IC3.2 R30.1 U1.6
SD2: TP2.TP TP6.TP TP38.TP TP42.TP U1.8 U9.9 U10.1 U11.1 U12.1
SD3: U1.10 U27.15 U30.27
SD4: PAD12.1 U1.13
SD5: R40.1 U1.15 U4.4
SD6: U1.17
SD7: U1.19
SDA: R9.1 U1.23 U$2.P9.20
T1: CH1-6.THERM CH1-7.THERM CH1-8.THERM CH1-9.THERM CH2-6.THERM CH2-7.THERM CH2-8.THERM CH2-9.THERM CH3-6.THERM CH3-7.THERM CH3-8.THERM CH3-9.THERM CH4-6.THERM CH4-7.THERM CH4-8.THERM CH4-9.THERM CH5-6.THERM CH5-7.THERM CH5-8.THERM CH5-9.THERM CH6-6.THERM CH6-7.THERM CH6-8.THERM CH6-9.THERM
USBM0: J2.USBM(8)
USBM1: J3.USBM(8)
USBP0: J2.USBP(7)
USBP1: J3.USBP(7)